# Altium PCB Mixed Signal Board Design Project.PcbDoc (part 1 of 2)
Units mm, origin at the board's own origin, x right, y up, seen from the top; angles counter-clockwise.
Board outline 70 x 70 mm, 4 copper layers (Top Layer, GND, VCC, Bottom Layer), stack 1.57 mm thick; 188 components, 142 nets, 738 pads, 121 vias.
Unrouted connection lines stored in the file: 495.
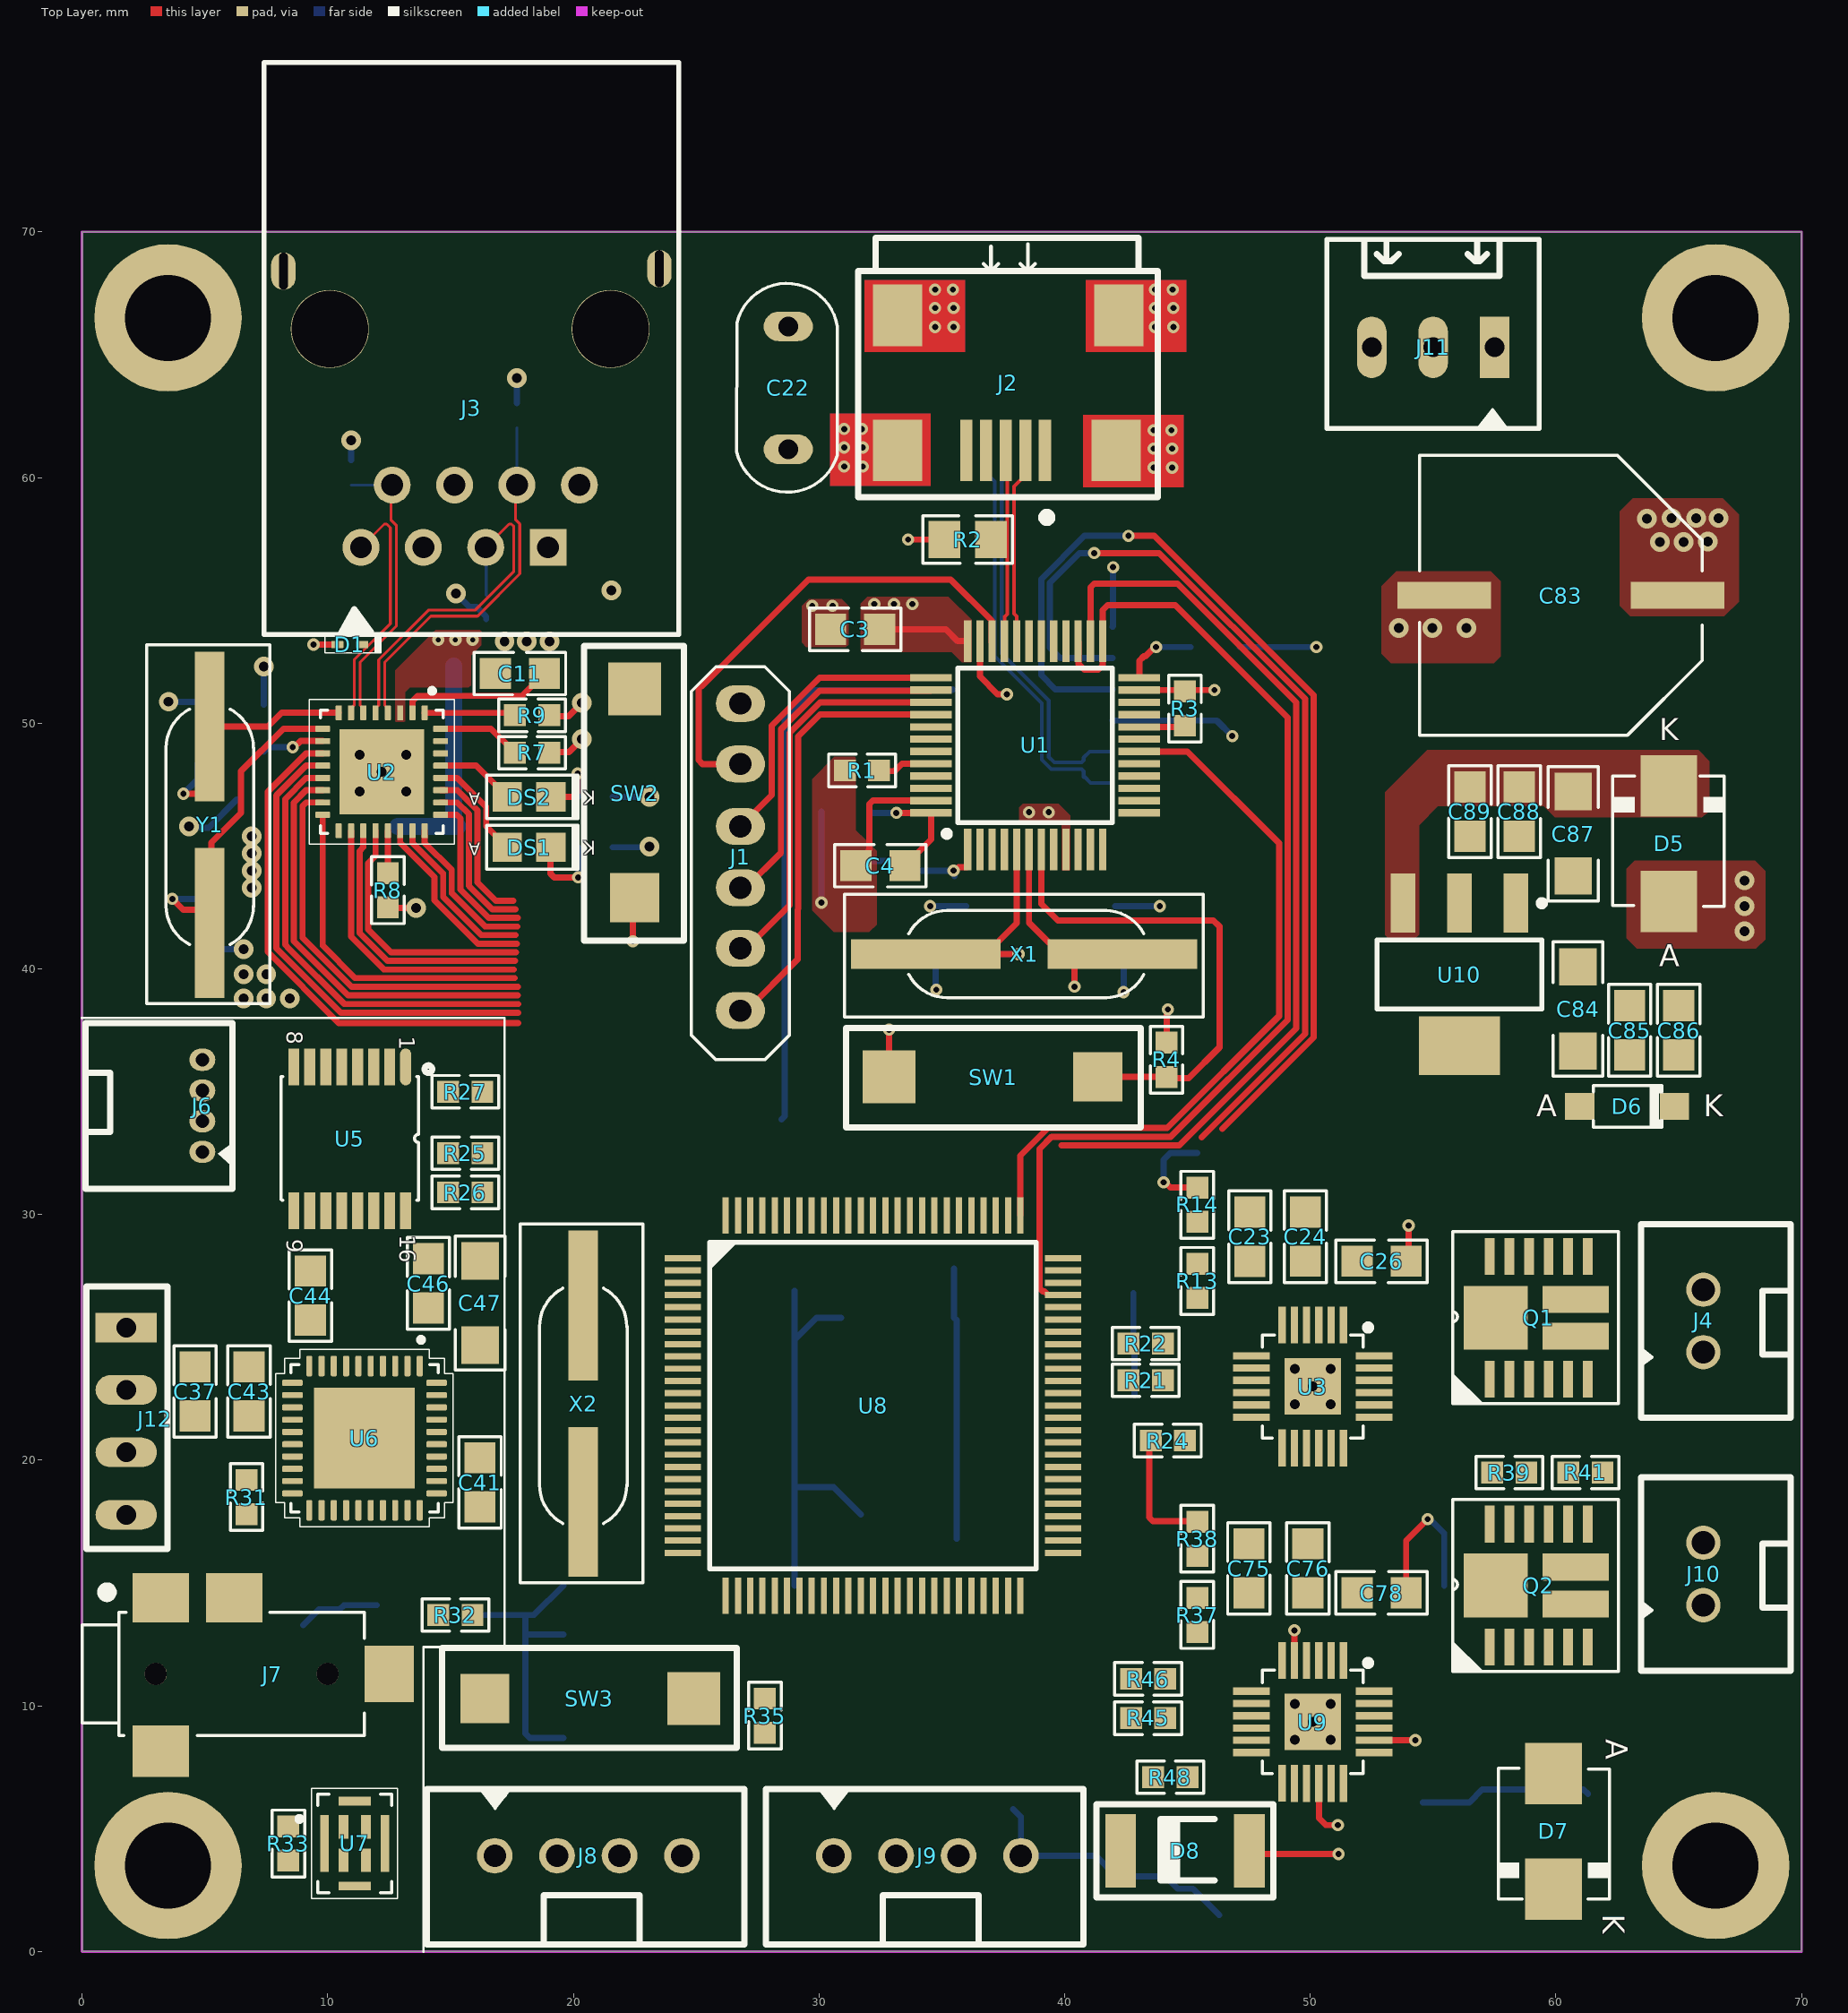
[diagram p0: Top Layer view]
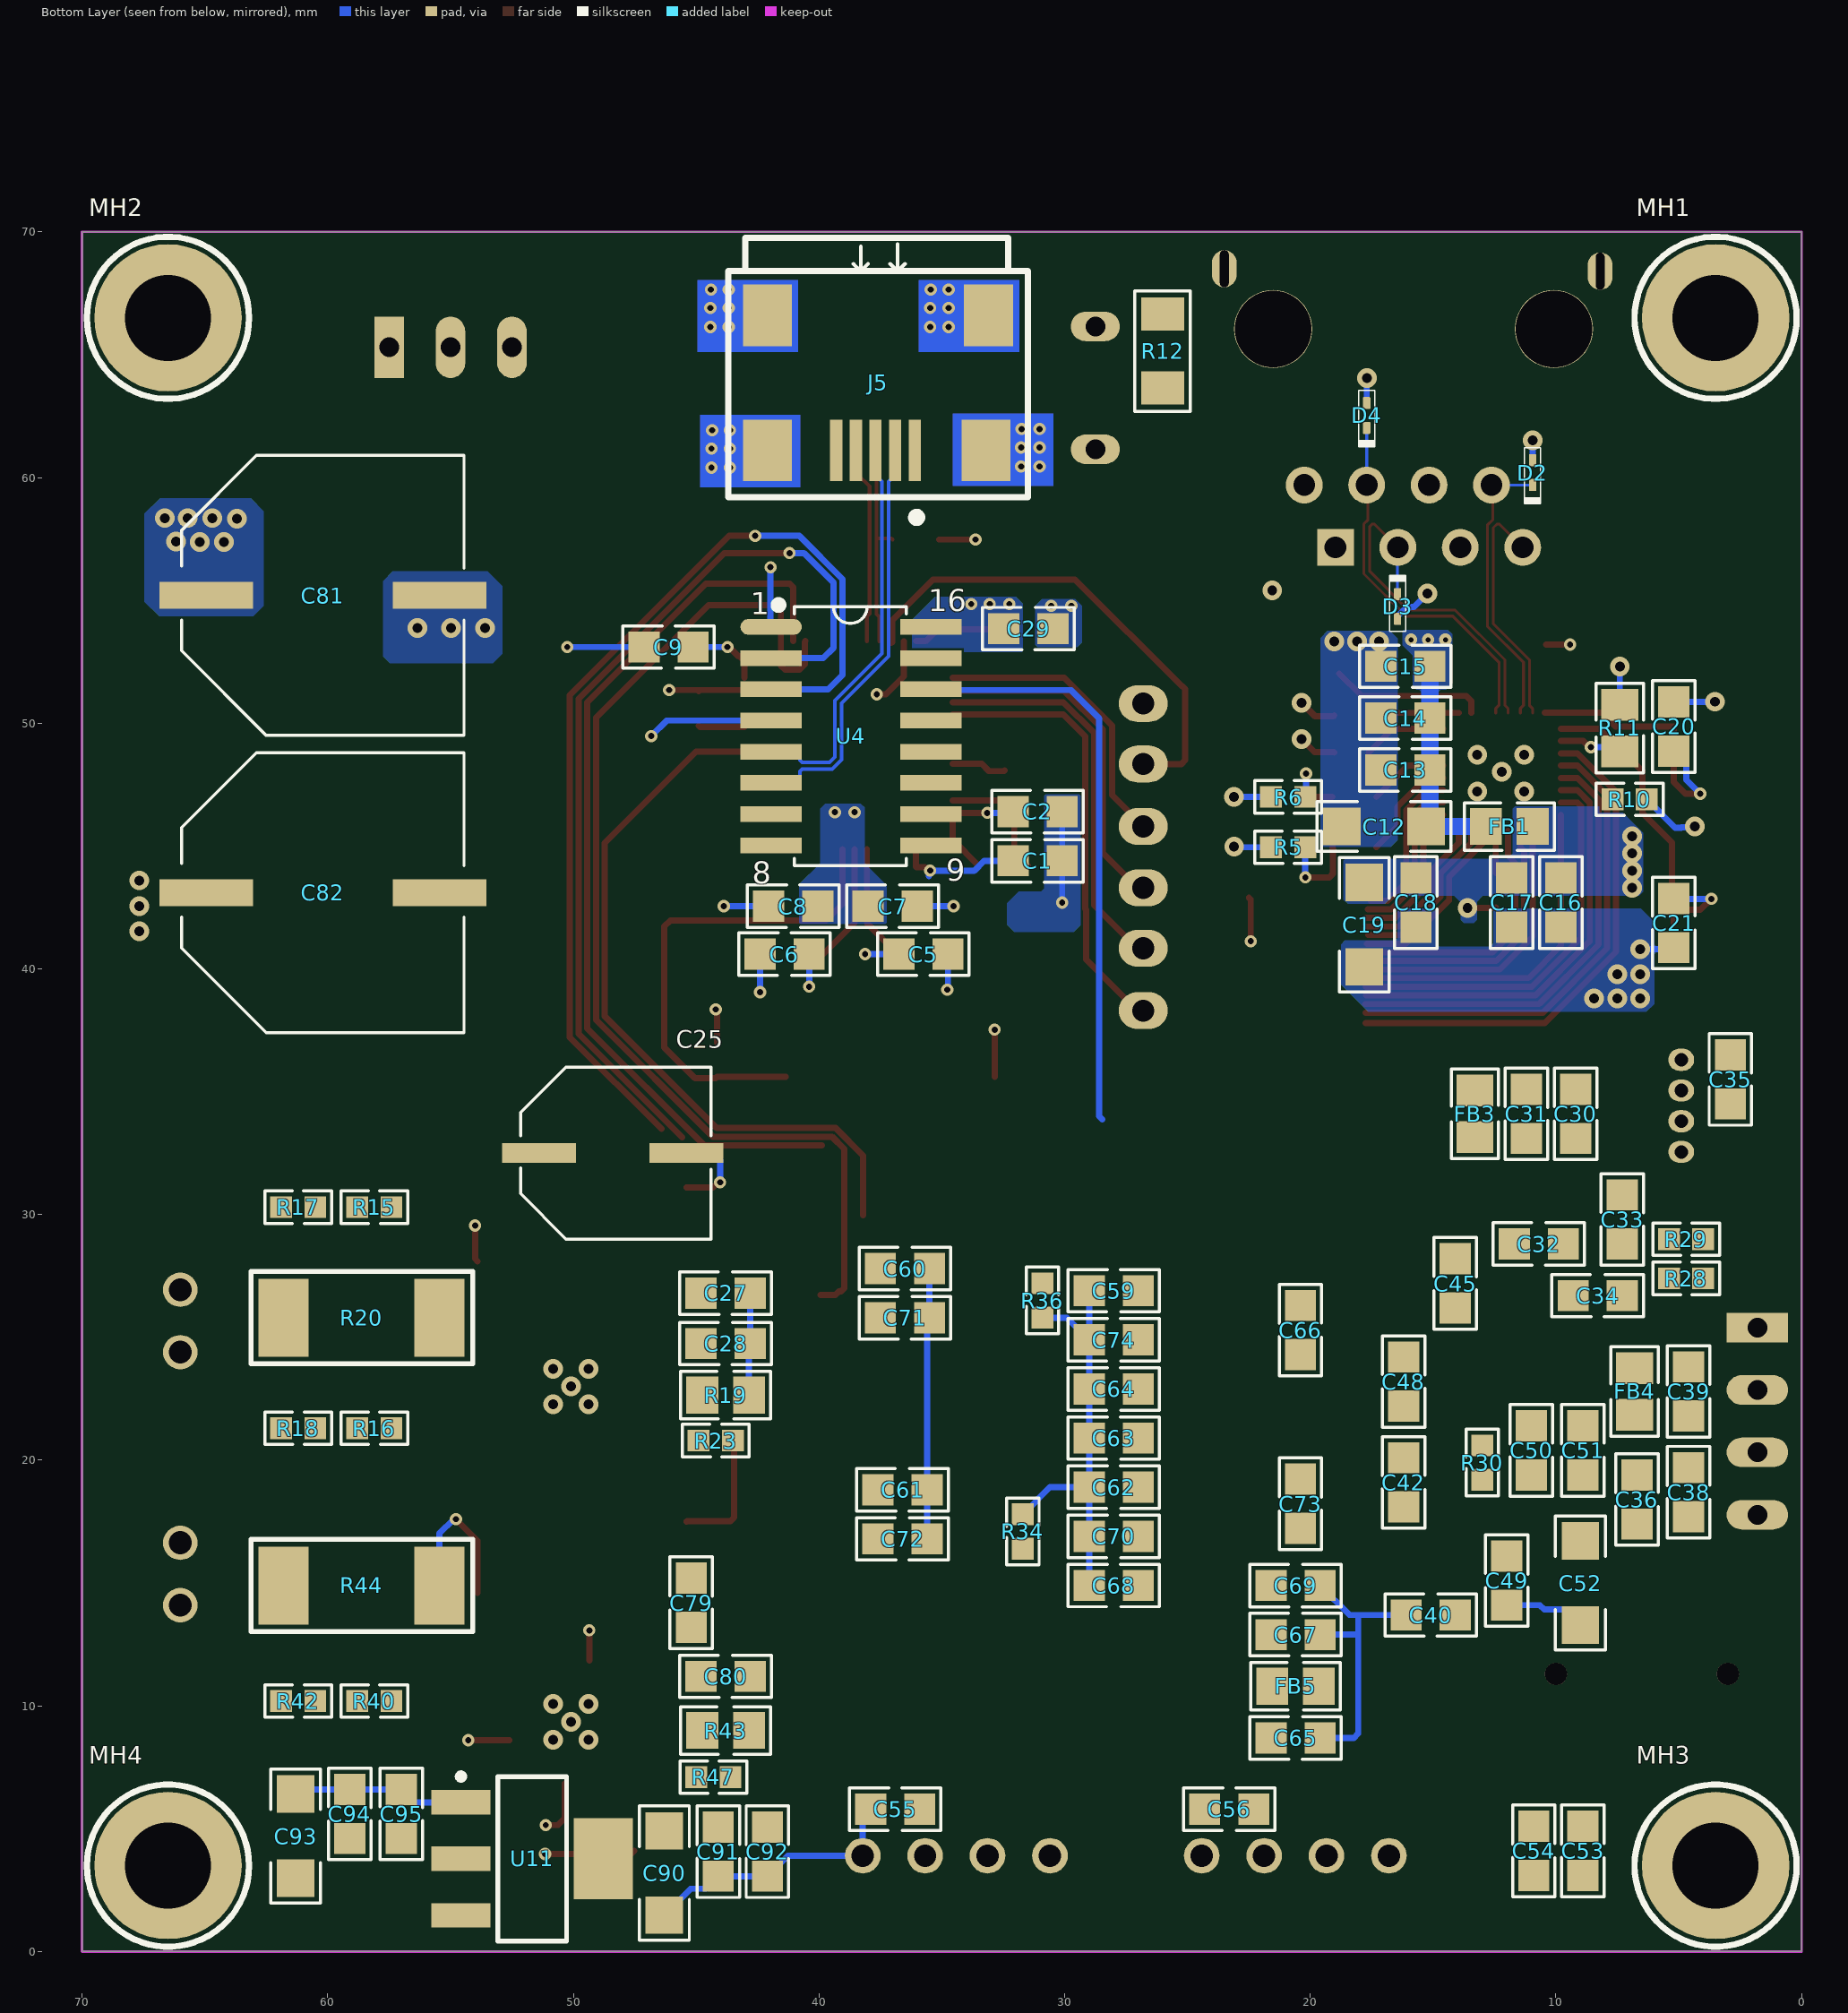
[diagram p1: Bottom Layer view, seen from below]
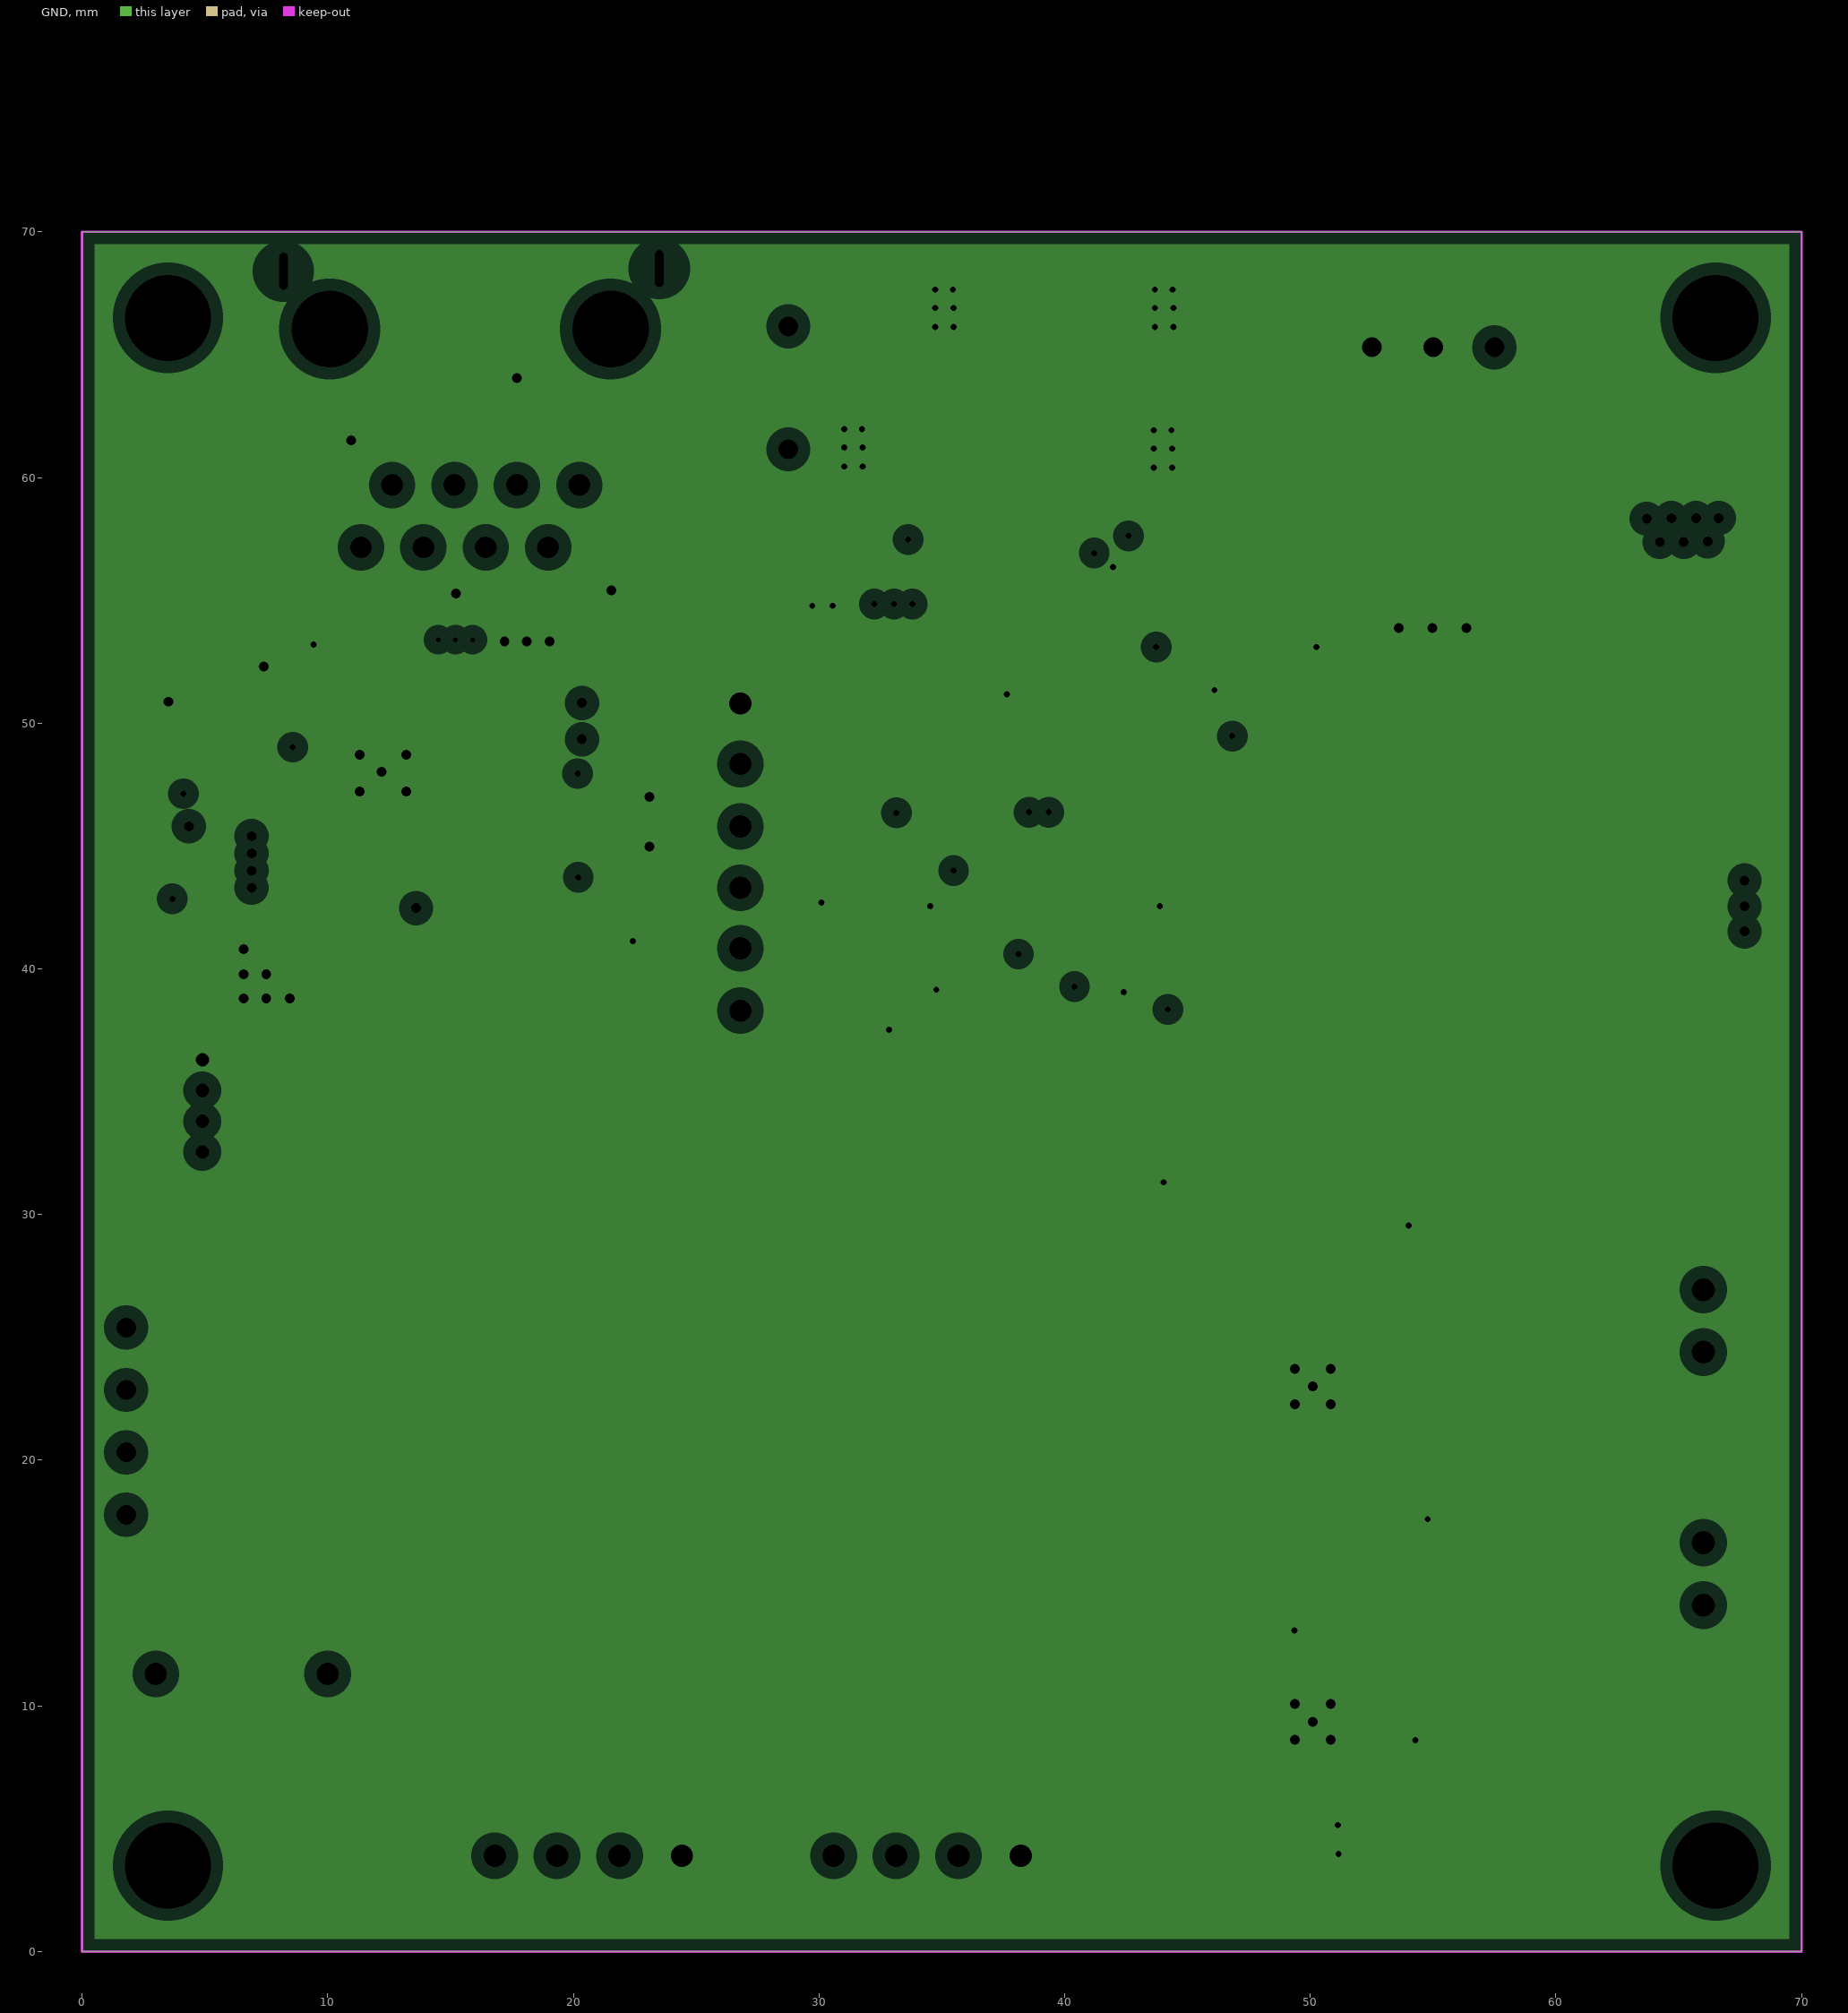
[diagram p2: GND, clearances drawn from the general rule]
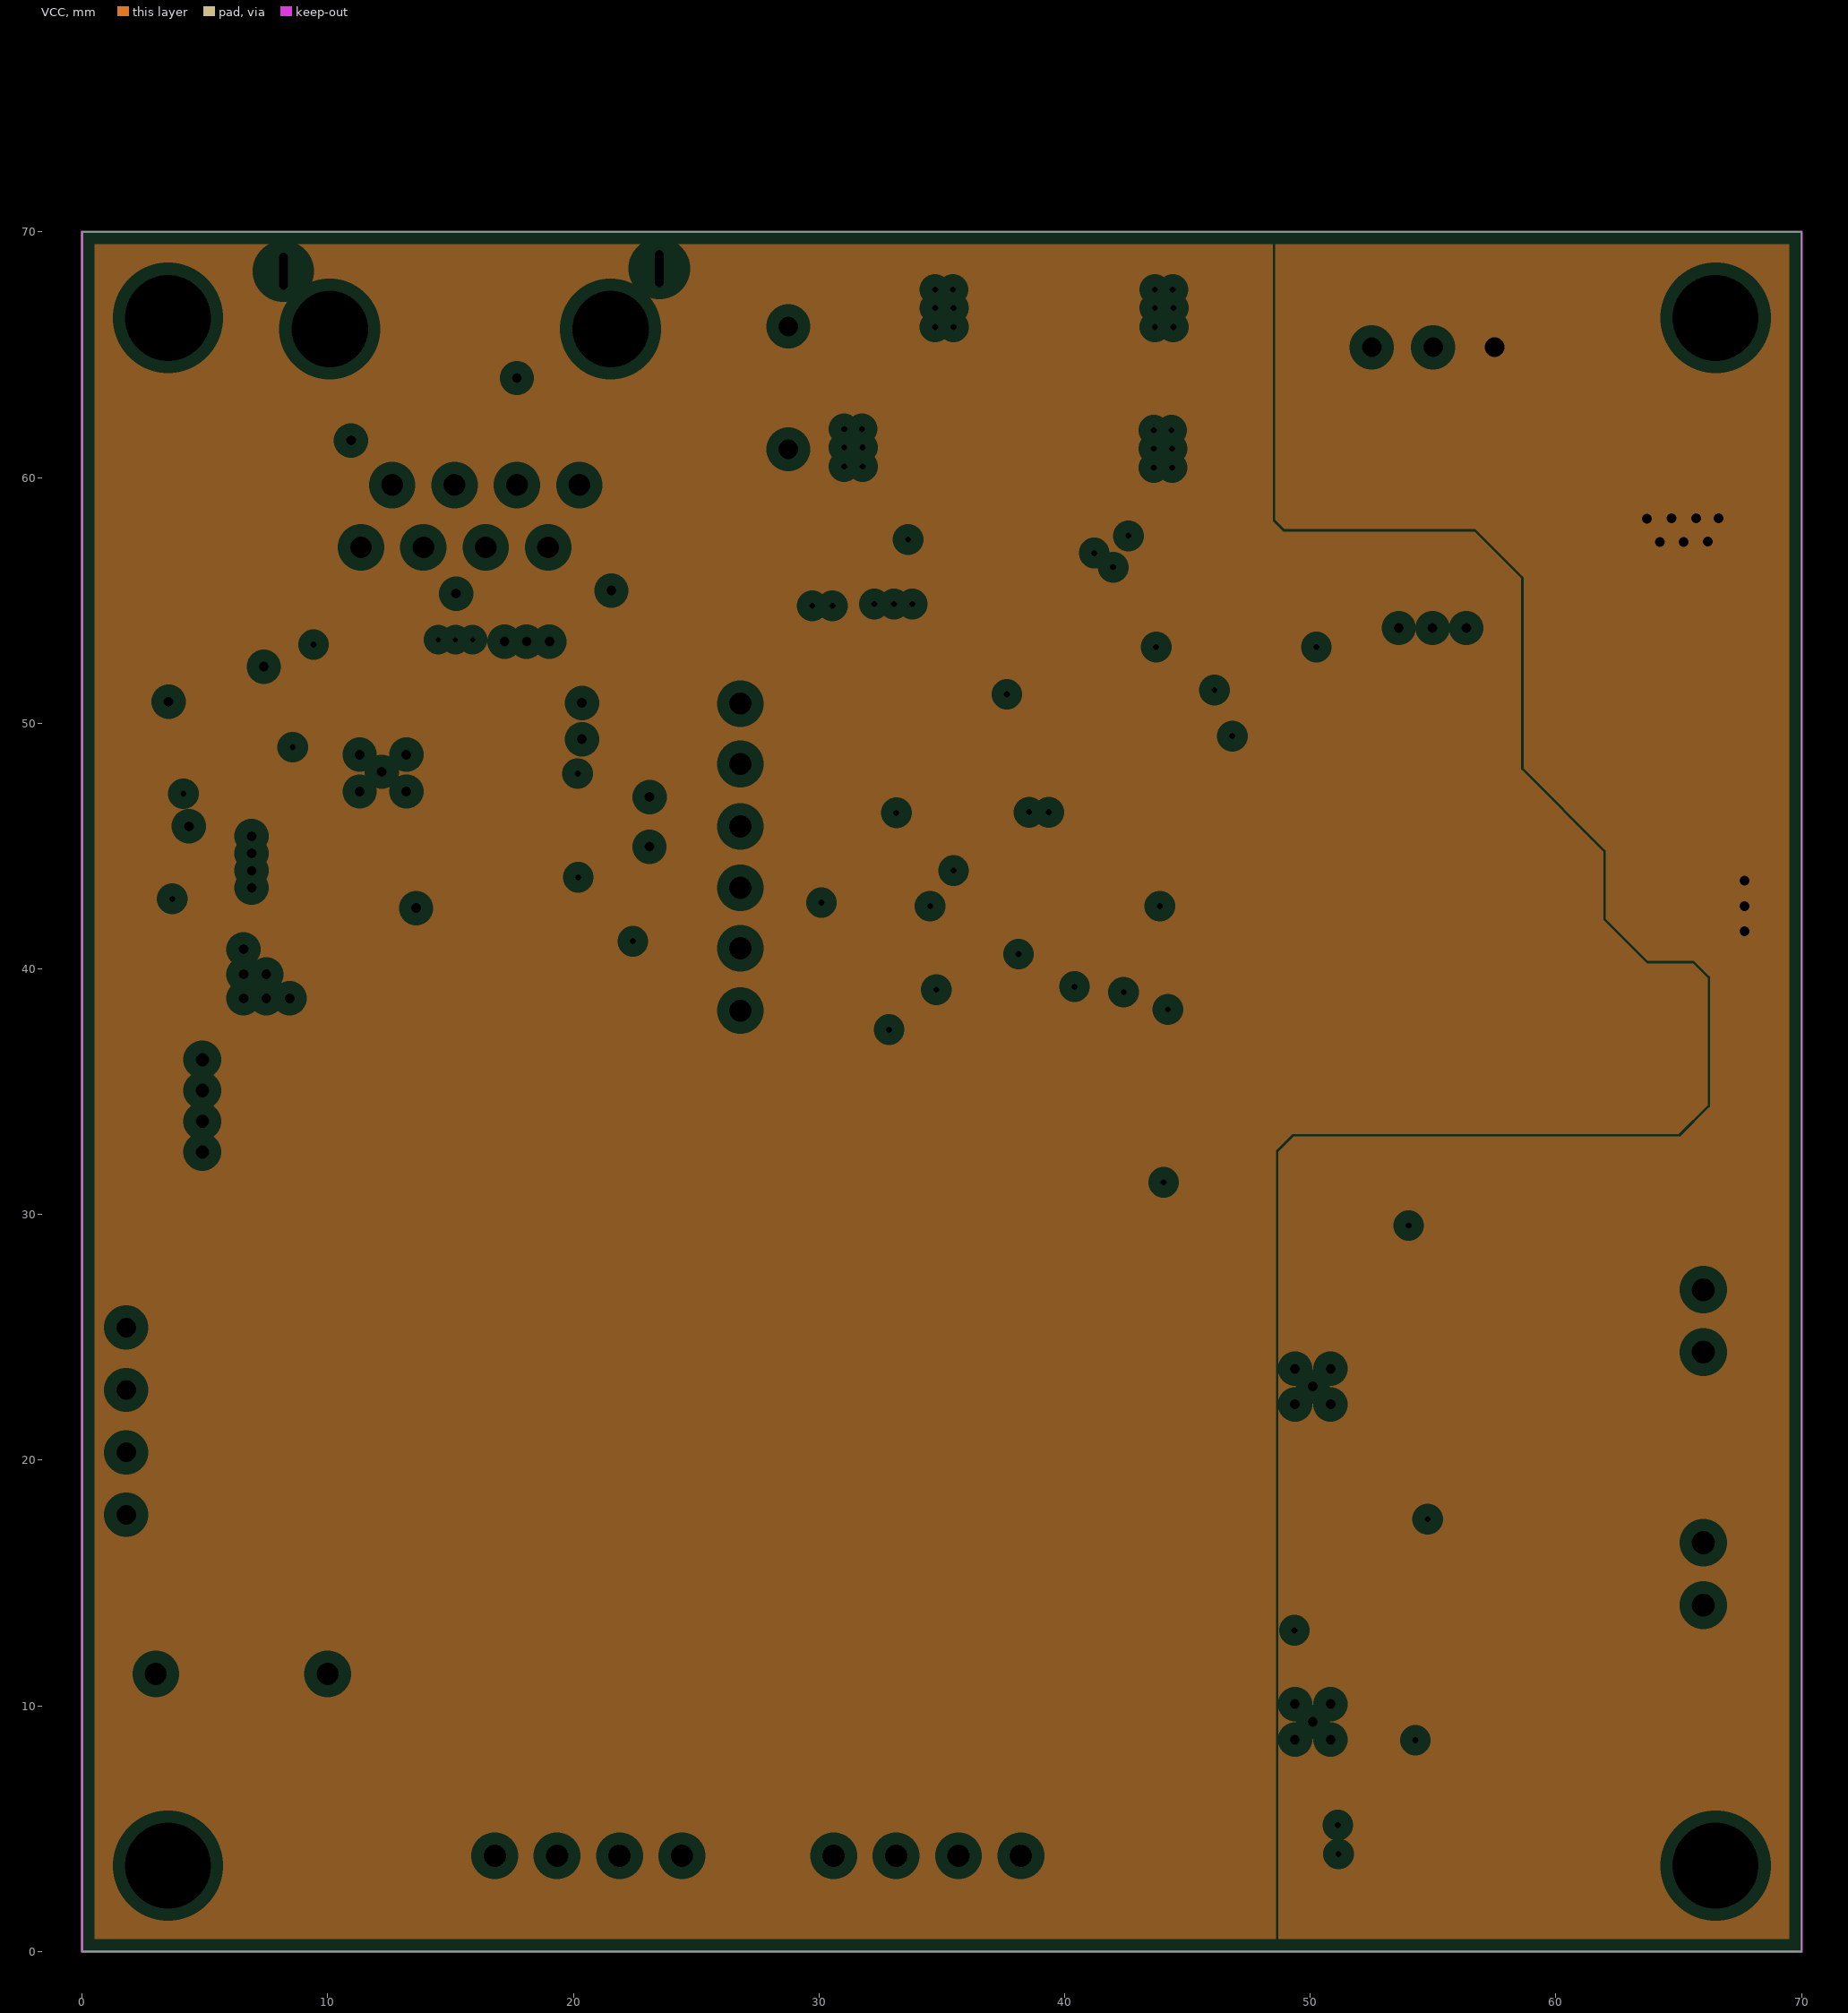
[diagram p3: VCC, clearances drawn from the general rule]

## Layer stack, top to bottom
Top Solder: solder mask 0.01, Solder Resist, Dk 3.5
Top Layer: signal copper 0.035
Dielectric 2: prepreg 0.1, PP-006, Dk 4.1
GND: plane copper 0.0175, net GND
Dielectric 1: dielectric 1.265, FR-4, Dk 4.8
VCC: plane copper 0.0175, net +3V3
Dielectric 3: prepreg 0.1, PP-006, Dk 4.1
Bottom Layer: signal copper 0.035
Bottom Solder: solder mask 0.01, Solder Resist, Dk 3.5

## Board outline
0,0 70,0 70,70 0,70

## Design rules (kind name [scope] priority, off if disabled: settings)
Clearance [All] p1: gap=0.1 ignorepadtopadclearanceinfootprint=FALSE
DiffPairsRouting "DIFF 100" [InDifferentialPairClass('DIFF100')] p1: maxlimit=0.127 minlimit=0.127 mostfreqgap=0.127 toplayer_minwidth=0.115 toplayer_maxwidth=0.115 toplayer_prefwidth=0.115 bottomlayer_minwidth=0.115 bottomlayer_maxwidth=0.115 bottomlayer_prefwidth=0.115 impedanceprofiledriven=TRUE impedanceprofileid={86F429B1-673F-4F48-8C56-42AE55F8C512} impedanceprofilevalue=100.000000 maxuncoupledlength=12.7
DiffPairsRouting [InDifferentialPairClass('DIFF90')] p2: maxlimit=0.127 minlimit=0.127 mostfreqgap=0.127 toplayer_minwidth=0.15 toplayer_maxwidth=0.15 toplayer_prefwidth=0.15 bottomlayer_minwidth=0.15 bottomlayer_maxwidth=0.15 bottomlayer_prefwidth=0.15 impedanceprofiledriven=TRUE impedanceprofileid={0B4FF4B0-A2EA-423A-8835-496D2E1C4AB5} impedanceprofilevalue=90.000000 maxuncoupledlength=12.7
MinimumSolderMaskSliver [All] p1: minsoldermaskwidth=0
PasteMaskExpansion [All] p1: expansion=-2539.975 usepaste=FALSE
PlaneClearance [All] p1: clearance=0.5
PlaneConnect [All] p1: planeconnectstyle=Direct reliefexpansion=0.508 reliefentries=4 reliefconductorwidth=0.254 reliefairgap=0.254
PolygonConnect [All] p1: connectstyle=Direct reliefconductorwidth=0.254 reliefentries=4 polygonreliefangle="90 Angle" airgapwidth=0.254
RoutingVias [All] p1: holewidth=0.3 width=0.6 viastyle="Through Hole" minholewidth=0.1 minwidth=0.1 maxholewidth=4 maxwidth=3
SilkToSilkClearance [All] p1: silktosilkclearance=0
SilkToSolderMaskClearance [IsPad] p1: minsilkscreentomaskgap=0.2 clearancetoexposedcopper=TRUE
SolderMaskExpansion [All] p1: expansion=0 istentingtop=TRUE
SupplyNets "Schematic Supply Nets_7" [InNet('GND')] p1: voltage=0.000
SupplyNets "Schematic Supply Nets_6" [InNet('+1V8')] p2: voltage=0.000
SupplyNets "Schematic Supply Nets_5" [InNet('DVDD')] p3: voltage=0.000
SupplyNets "Schematic Supply Nets_4" [InNet('ERATH')] p4: voltage=0.000
SupplyNets "Schematic Supply Nets_3" [InNet('+3V3')] p5: voltage=0.000
SupplyNets "Schematic Supply Nets_2" [InNet('+12V')] p6: voltage=0.000
Width [All] p1: maxlimit=3 minlimit=0.01 preferedwidth=0.254
23 further rules are at their usual default settings.

## Classes and differential pairs
net class DIFF50: COL CRS INT MDC MDIO RX_CLK RX_D0 RX_D1 RX_D2 RX_D3 RX_DV RX_ER TX_CLK TX_D0 TX_D1 TX_D2 TX_D3 TX_EN
differential pair class DIFF100: RD TD
differential pair class DIFF90: CH340USB USB
component class "[11] - Power Input and Regulators": C81 C82 C83 C84 C85 C86 C87 C88 C89 C90 C91 C92 C93 C94 C95 D5 D6 D7 D8 J11 MH1 MH2 MH3 MH4 U10 U11
component class "[10] - Motor Driver Schematic2": C75 C76 C78 C79 C80 J10 Q2 R37 R38 R39 R40 R41 R42 R43 R44 R45 R46 R47 R48 U9
component class "[9] - STM32F407 Controller": C55 C56 C59 C60 C61 C62 C63 C64 C65 C66 C67 C68 C69 C70 C71 C72 C73 C74 FB5 J8 J9 R34 R35 R36 SW3 U8 X2
component class "[8] - DAC and MIC": C36 C37 C38 C39 C40 C41 C42 C43 C44 C45 C46 C47 C48 C49 C50 C51 C52 C53 C54 FB4 J7 J12 R30 R31 R32 R33 U6 U7
component class "[7] - ADC Chip": C30 C31 C32 C33 C34 C35 FB3 J6 R25 R26 R27 R28 R29 U5
component class "[6] - CH340C": C29 J5 U4
component class "[5] - Motor Driver Schematic": C23 C24 C25 C26 C27 C28 J4 Q1 R13 R14 R15 R16 R17 R18 R19 R20 R21 R22 R23 R24 U3
component class "[4] - Ethernet PHY": C11 C12 C13 C14 C15 C16 C17 C18 C19 C20 C21 C22 D1 D2 D3 D4 DS1 DS2 FB1 J3 R5 R6 R7 R8 R9 R10 R11 R12 SW2 U2 Y1
component class "[3] - STM32F103 Debugger": C1 C2 C3 C4 C5 C6 C7 C8 C9 J1 J2 R1 R2 R3 R4 SW1 U1 X1
differential pair USB: +USB_P -USB_N
differential pair TD: +TD_P -TD_N
differential pair RD: +RD_P -RD_N
differential pair CH340USB: +CH340USB_P -CH340USB_N

## Components (designator, comment, footprint, x,y, rotation, side; value= is the part's Value field where it differs from the comment)
C1 "4.7uF" CAP_0805#1 31.1,44.4 r0 bottom
C2 "0.1uF" CAP_0805#1 31.1,46.4 r0 bottom
C3 "0.1uF" CAP_0805#2 31.475,53.825 r0 top
C4 "0.1uF" CAP_0805#2 32.5,44.2 r0 top
C5 "30pF" CAP_0805#1 35.75,40.6 r0 bottom
C6 "30pF" CAP_0805#1 41.4,40.6 r180 bottom
C7 "1uF" CAP_0805#1 37,42.55 r0 bottom
C8 "10nF" CAP_0805#1 41.05,42.55 r180 bottom
C9 "0.1uF" CAP_0805#1 46.125,53.1 r180 bottom
C11 "2nF" CAP_0805#2 17.825,52.022 r0 top
C12 "10uF" CAP_1206 17,45.8 r180 bottom
C13 "1uF" CAP_0805#1 16.133,48.1 r180 bottom
C14 "0.1uF" CAP_0805#1 16.133,50.208 r180 bottom
C15 "10nF" CAP_0805#1 16.133,52.317 r180 bottom
C16 "10nF" CAP_0805#1 9.8,42.7 r270 bottom
C17 "0.1uF" CAP_0805#1 11.8,42.7 r270 bottom
C18 "1uF" CAP_0805#1 15.7,42.7 r270 bottom
C19 "10uF" CAP_1206 17.8,41.8 r270 bottom
C20 "20pF" CAP_0805#1 5.2,49.866 r270 bottom
C21 "20pF" CAP_0805#1 5.2,41.866 r90 bottom
C22 "10nF" CAP_P196_102X287_H332_RAD_TH 28.75,61.15 r90 top
C23 "0.1uF" CAP_0805#2 47.54,29.097 r270 top
C24 "1uF" CAP_0805#2 49.8,29.1 r270 top
C25 "100uF" ACAP_P236_D305_H303_RAD 48.4,32.5 r180 bottom
C26 "0.1uF" CAP_0805#2 52.9,28.1 r180 top
C27 "1uF" CAP_0805#1 43.8,26.8 r0 bottom
C28 "1uF" CAP_0805#1 43.8,24.75 r0 bottom
C29 "0.1uF" CAP_0805#1 31.475,53.85 r0 bottom
C30 "0.1uF" CAP_0805#2 9.2,34.1 r270 bottom
C31 "0.1uF" CAP_0805#2 11.2,34.1 r270 bottom
C32 "0.1uF" CAP_0805#2 10.7,28.8 r0 bottom
C33 "10nF" CAP_0805#2 7.3,29.8 r270 bottom
C34 "10nF" CAP_0805#2 8.3,26.7 r0 bottom
C35 "0.1uF" CAP_0805#2 2.9,35.5 r270 bottom
C36 "22nF" CAP_0805#2 6.7,18.4 r90 bottom
C37 "0.1uF" CAP_0805#2 4.6,22.8 r90 top
C38 "0.1uF" CAP_0805#2 4.6,18.7 r90 bottom
C39 "1uF" CAP_0805#2 4.6,22.8 r90 bottom
C40 "22nF" CAP_0805#2 15.1,13.7 r0 bottom
C41 "1uF" CAP_0805#2 16.2,19.1 r90 top
C42 "0.1uF" CAP_0805#2 16.2,19.1 r90 bottom
C43 "1uF" CAP_0805#2 6.8,22.8 r90 top
C44 "1uF" CAP_0805#2 9.3,26.7 r90 top
C45 "0.1uF" CAP_0805#2 14.1,27.2 r270 bottom
C46 "1uF" CAP_0805#2 14.1,27.2 r270 top
C47 "10uF" CAP_1206 16.2,26.4 r90 top
C48 "0.1uF" CAP_0805#2 16.2,23.2 r270 bottom
C49 "150pF" CAP_0805#2 12,15.1 r270 bottom
C50 "150pF" CAP_0805#2 11,20.4 r90 bottom
C51 "1uF" CAP_0805#2 8.9,20.4 r90 bottom
C52 "10uF" CAP_1206 9,15 r270 bottom
C53 "0.1uF" CAP_0805#2 8.9,4.1 r90 bottom
C54 "1uF" CAP_0805#2 10.9,4.1 r90 bottom
C55 "0.1uF" CAP_0805#1 36.9,5.8 r180 bottom
C56 "0.1uF" CAP_0805#1 23.3,5.8 r180 bottom
C59 "4.7uF" CAP_0805#2 28,26.9 r180 bottom
C60 "0.1uF" CAP_0805#2 36.5,27.8 r0 bottom
C61 "0.1uF" CAP_0805#2 36.6,18.8 r0 bottom
C62 "0.1uF" CAP_0805#2 28,18.9 r180 bottom
C63 "0.1uF" CAP_0805#2 28,20.9 r180 bottom
C64 "0.1uF" CAP_0805#2 28,22.9 r180 bottom
C65 "0.1uF" CAP_0805#2 20.6,8.7 r0 bottom
C66 "30pF" CAP_0805#1 20.4,25.3 r90 bottom
C67 "1uF" CAP_0805#2 20.6,12.9 r0 bottom
C68 "1uF" CAP_0805#2 28,14.9 r180 bottom
C69 "0.1uF" CAP_0805#2 20.6,14.9 r0 bottom
C70 "0.1uF" CAP_0805#2 28,16.9 r180 bottom
C71 "2.2uF" CAP_0805#2 36.5,25.8 r0 bottom
C72 "2.2uF" CAP_0805#2 36.6,16.8 r0 bottom
C73 "30pF" CAP_0805#1 20.4,18.227 r270 bottom
C74 "0.1uF" CAP_0805#2 28,24.9 r180 bottom
C75 "0.1uF" CAP_0805#2 47.5,15.6 r270 top
C76 "1uF" CAP_0805#2 49.9,15.6 r270 top
C78 "0.1uF" CAP_0805#2 52.9,14.6 r180 top
C79 "1uF" CAP_0805#1 45.2,14.2 r270 bottom
C80 "1uF" CAP_0805#1 43.8,11.2 r0 bottom
C81 "100uF" ACAP_P305_D393_H393_RAD 60.2,55.2 r180 bottom
C82 "100uF" ACAP_P305_D393_H393_RAD 60.2,43.1 r180 bottom
C83 "100uF" ACAP_P305_D393_H393_RAD 60.2,55.2 r180 top
C84 "10uF" CAP_1206 60.9,38.367 r270 top
C85 "1uF" CAP_0805#2 63,37.5 r270 top
C86 "0.1uF" CAP_0805#2 65,37.5 r270 top
C87 "10uF" CAP_1206 60.7,45.5 r90 top
C88 "1uF" CAP_0805#2 58.5,46.4 r90 top
C89 "0.1uF" CAP_0805#2 56.5,46.4 r90 top
C90 "10uF" CAP_1206 46.3,3.2 r90 bottom
C91 "1uF" CAP_0805#2 44.1,4.067 r90 bottom
C92 "0.1uF" CAP_0805#2 42.1,4.067 r90 bottom
C93 "10uF" CAP_1206 61.3,4.7 r270 bottom
C94 "1uF" CAP_0805#2 59.1,5.6 r270 bottom
C95 "0.1uF" CAP_0805#2 57,5.6 r270 bottom
D1 "ESD3V3D9-TP" DIO_SOD-923 10.9,53.2 r180 top
D2 "ESD3V3D9-TP" DIO_SOD-923 10.95,60.2 r90 bottom
D3 "ESD3V3D9-TP" DIO_SOD-923 16.45,54.75 r270 bottom
D4 "ESD3V3D9-TP" DIO_SOD-923 17.705,62.525 r90 bottom
D5 "MBRS130LT3G" DIO_SMB_DO-214AA 64.6,45.1 r90 top
D6 "BZT52C3V3-7-F" DIO_SOD-123 62.9,34.4 r0 top
D7 "MBRS130LT3G" DIO_SMB_DO-214AA 59.9,4.9 r270 top
D8 "1.8V Zener" DIO_DO-213AB_SMD 44.9,4.1 r0 top
DS1 "RED LED" LED_0805 18.2,44.95 r180 top
DS2 "RED LED" LED_0805 18.2,47 r180 top
FB1 "1K" IND_0805#1 11.9,45.795 r180 bottom
FB3 "1K" IND_0805#2 13.3,34.1 r270 bottom
FB4 "1K" IND_0805#2 6.8,22.8 r270 bottom
FB5 "1K" IND_0805#2 20.6,10.8 r180 bottom
J1 "Bergstrip 2.54mm" CON6_100_59D78_TH_ST 26.8,38.3 r90 top
J2 "USB2.0 MINI B" CON_690-005-299-043 33.2,61.1 r270 top
J3 "RJ45 LAN" CON10_P106_RJ45_TH_ST 21.5,66.1 r180 top
J4 "B2B-XH-A(LF)(SN)" CON2_100_B2B-XH-A_TH_ST 66,24.4 r90 top
J5 "USB2.0 MINI B" CON_690-005-299-043 42.1,61.1 r270 bottom
J6 "1.25MM Spade 4PIN" CON4_50_653004117322_TH_RA 4.9,36.3 r90 top
J7 "4X1 STEREO" CON_SJ-2504A-SMT-TR_SMD 6.5,11.3 r0 top
J8 "B4B-XH-A(LF)(SN)" CON4_100_B4B-XH-A_TH_ST 16.8,3.9 r0 top
J9 "B4B-XH-A(LF)(SN)" CON4_100_B4B-XH-A_TH_ST 30.6,3.9 r0 top
J10 "B2B-XH-A(LF)(SN)" CON2_100_B2B-XH-A_TH_ST 66,14.1 r90 top
J11 "Terminal Block 2.5mm" CON3_100_TB_TH_ST 55,65.3 r270 top
J12 "4X1 BERG STRIP" CON4_100_40D72_TH_ST_MALE 1.8,25.4 r0 top
MH1 "Mounting Hole" MOUNTING 3.5,66.5 r180 bottom
MH2 "Mounting Hole" MOUNTING 66.5,66.5 r180 bottom
MH3 "Mounting Hole" MOUNTING 3.5,3.5 r180 bottom
MH4 "Mounting Hole" MOUNTING 66.5,3.5 r180 bottom
Q1 "DMHT6016LFJ-13" DFN5045-12_33_212_27X15_SMD_1 59.3,25.8 r0 top
Q2 "DMHT6016LFJ-13" DFN5045-12_33_212_27X15_SMD_1 59.3,14.9 r0 top
R1 "100K" RES_0603#1 31.75,48.075 r180 top
R2 "1.5K" RES_0805#1 36.05,57.475 r0 top
R3 "100K" RES_0603#2 44.9,50.6 r270 top
R4 "10K" RES_0603#1 44.15,36.3 r90 top
R5 "3K3" RES_0603#2 20.902,44.95 r180 bottom
R6 "3K3" RES_0603#2 20.902,47 r180 bottom
R7 "3K3" RES_0603#1 18.32,48.8 r180 top
R8 "10K" RES_0603#1 12.45,43.2 r270 top
R9 "10K" RES_0603#1 18.32,50.322 r0 top
R10 "10K" RES_0603#2 7,46.9 r180 bottom
R11 "6.49K" RES_0805#2 7.4,49.8 r90 bottom
R12 "1M" RES_1206 26,65.15 r270 bottom
R13 "2K2" RES_0603#1 45.4,27.3 r90 top
R14 "3K3" RES_0603#1 45.4,30.4 r270 top
R15 "10K" RES_0603#2 58.1,30.3 r0 bottom
R16 "10K" RES_0603#2 58.1,21.3 r0 bottom
R17 "10K" RES_0603#2 61.2,30.3 r0 bottom
R18 "10K" RES_0603#2 61.2,21.3 r180 bottom
R19 "33K" RES_0805#2 43.8,22.65 r180 bottom
R20 "50mOHM" RES_2512 58.625,25.8 r0 bottom
R21 "10K" RES_0603#1 43.3,23.25 r180 top
R22 "10K" RES_0603#1 43.3,24.75 r180 top
R23 "10K" RES_0603#2 44.202,20.8 r180 bottom
R24 "10K" RES_0603#1 44.202,20.8 r180 top
R25 "10K" RES_0603#1 15.6,32.5 r0 top
R26 "10K" RES_0603#1 15.6,30.9 r0 top
R27 "100K" RES_0603#1 15.6,35 r180 top
R28 "1K" RES_0603#1 4.702,27.4 r180 bottom
R29 "1K" RES_0603#1 4.702,29 r180 bottom
R30 "10K" RES_0603#1 13,19.9 r90 bottom
R31 "51.1R" RES_0603#1 6.7,18.5 r270 top
R32 "51.1R" RES_0603#1 15.2,13.7 r180 top
R33 "10K" RES_0603#1 8.4,4.4 r90 top
R34 "100K" RES_0603#1 31.7,17.1 r270 bottom
R35 "10K" RES_0603#1 27.8,9.6 r270 top
R36 "100K" RES_0603#2 30.9,26.5 r90 bottom
R37 "2K2" RES_0603#1 45.4,13.7 r90 top
R38 "3K3" RES_0603#1 45.4,16.8 r270 top
R39 "10K" RES_0603#1 58.1,19.5 r0 top
R40 "10K" RES_0603#2 58.1,10.2 r0 bottom
R41 "10K" RES_0603#1 61.2,19.5 r0 top
R42 "10K" RES_0603#2 61.2,10.2 r180 bottom
R43 "33K" RES_0805#2 43.8,9 r180 bottom
R44 "50mOHM" RES_2512 58.625,14.9 r0 bottom
R45 "10K" RES_0603#1 43.4,9.5 r180 top
R46 "10K" RES_0603#1 43.4,11.1 r0 top
R47 "10K" RES_0603#2 44.3,7.1 r180 bottom
R48 "10K" RES_0603#1 44.3,7.1 r180 top
SW1 "TACTILE SWITCH" SW_342_SMD 41.35,35.6 r0 top
SW2 "TACTILE SWITCH" SW_342_SMD 22.5,42.9 r270 top
SW3 "TACTILE SWITCH" SW_342_SMD 16.4,10.3 r180 top
U1 "STM32F103C8T6" LQFP-48_19.6_393_58X11_SMD 38.8,49.1 r90 top
U2 "DP83826IRHBR" VQFN32_19_218_23X9_SMD 12.2,48.022 r270 top
U3 "DRV8701ERGET" VFQFN24_19.6_196_12X32_SMD_1 48.1,24.25 r270 top
U4 "CH340C" SOIC16_50_284_25X90_SMT 38.7,49.5 r180 bottom
U5 "ADS122C04IPW" TSSOP16_25-59_294_54X14_SMT 10.9,33.1 r270 top
U6 "CS43L22-CNZ" QFN40_19_284_33X9_SMD 11.5,20.9 r270 top
U7 "IMP34DT05TR" HCLGA-4_53_137_15X37_SMD 11.1,4.4 r0 top
U8 "STM32F407VGT6" QFN100_19.6_669_58X10_SMD 32.2,22.1 r0 top
U9 "DRV8701ERGET" VFQFN24_19.6_196_12X32_SMD_1 48.1,10.6 r270 top
U10 "LD1117S33CTR" SOT223_3 56.1,39.8 r270 top
U11 "LD1117S33CTR" SOT223_3 51.7,3.8 r180 bottom
X1 "8Mhz" XTAL_314_240X47_SMD 42.35,40.6 r180 top
X2 "8Mhz" XTAL_314_240X47_SMD 20.4,18.3 r90 top
Y1 "25Mhz -14mm" XTAL_314_240X47_SMD 5.2,41.866 r90 top

## Footprints (in the part's own frame and the unit in brackets; to place one, negate y for a bottom-side part, rotate by r counter-clockwise, add the part's x,y. Pads: shape width x height; smd on the part's side, far side on the other; paste and mask are expansions set on the pad)
ACAP_P236_D305_H303_RAD [mm] "Aluminium Capacitor"
  rect 3x0.8 smd mask+0.076: 1(-3,0) 2(3,0)
  silkscreen extent -3.75,-3.5 4,3.5, body extent -3.5,-3.3 3.5,3.3, height 8.11
ACAP_P305_D393_H393_RAD [mm] "Aluminium Capacitor"
  rect 3.81x1.1 smd: 1(-4.75,0) 2(4.75,0)
  silkscreen extent -5.75,-5.7 5.75,5.7, body extent -5.5,-5.2 5.5,5.2, height 10.41
CAP_0805#1 [mm] "Ceramic Capacitor"
  rect 1.27x1.27 smd mask+0.076: 1(-1,0) 2(1,0)
  silkscreen extent -1.86,-0.86 1.86,0.86, body extent -1,-0.62 1,0.63, height 0.78
CAP_0805#2 [mm] "Ceramic Capacitor"
  rect 1.27x1.27 smd: 1(-1,0) 2(1,0)
  silkscreen extent -1.86,-0.86 1.86,0.86, body extent -1,-0.62 1,0.63, height 0.78
CAP_1206 [mil] "Ceramic Capacitor"
  rect 60x60 smd: 1(-67.49,-0.2) 2(67.51,-0.2)
  silkscreen extent -107,-40 108,40, body extent -63,-31 63,32, height 39
CAP_P196_102X287_H332_RAD_TH [mm] "Y1 CAP, TROUGH HOLE"
  oval 1.2x2 hole 0.8: 1(0,0) 2(5,0)
  silkscreen extent -1.75,-2 6.75,2.1, body extent -1.04,-1.3 6.04,1.3, height 9.14
CON2_100_B2B-XH-A_TH_ST [mm] "Connector Header"
  round 1.4 hole 0.94: 1(0,0) 2(2.54,0)
  silkscreen extent -2.67,-3.56 5.21,2.54, body extent -2.41,-3.5 5.01,2.54, height 8.44
CON3_100_TB_TH_ST [mm]
  rect 2.5x1.2 hole 0.8: 1(0,2.5)
  oval 2.5x1.2 hole 0.8: 2(0,0) 3(0,-2.5)
  silkscreen extent -4.4,-4.32 3.3,4.32, body extent -2.5,-4.07 3.1,4.07, height 12.86
CON4_50_653004117322_TH_RA [mm] "wurth connector"
  oval 0.9x1.05 hole 0.55: 1(-3.75,0) 2(-2.5,0) 3(-1.25,0) 4(0,0)
  silkscreen extent -5.25,-1.34 1.5,4.75, body extent -5.27,-0.45 1.48,4.98, height 3.65
CON4_100_40D72_TH_ST_MALE [mm] "Berg Strip"
  rect 2.5x1.2 hole 0.8: 1(0,0)
  oval 2.5x1.2 hole 0.8: 2(0,-2.54) 3(0,-5.08) 4(0,-7.62)
  round 1.016 on Top Overlay: ""(2.311,0.178)
  silkscreen extent -1.63,-9.02 1.68,1.68, body extent -1.14,-8.76 1.4,1.4, height 8.55
CON4_100_B4B-XH-A_TH_ST [mm] "Connector Header"
  round 1.45 hole 0.91: 1(0,0) 2(2.54,0) 3(5.08,0) 4(7.62,0)
  silkscreen extent -2.77,-3.61 10.16,2.72, body extent -2.4,-3.28 10,2.48, height 8.32
CON6_100_59D78_TH_ST [mm] "Bergstrip"
  oval 1.5x2 hole 0.9: 1(0,0) 2(2.54,0) 3(5,0) 4(7.5,0) 5(10.04,0) 6(12.5,0)
  silkscreen extent -2,-2 14,2, body extent -1.35,-1.24 13.89,1.3, height 8.55
CON10_P106_RJ45_TH_ST [mm] "LAN Connector"
  round 1.5 hole 0.89 paste-2539.97: 1(10.145,8.945) 2(8.875,6.405) 3(7.605,8.945) 4(6.335,6.405) 6(3.795,6.405)
  round 1.5 hole 0.89 paste-2539.97 mask+0: 5(5.065,8.945) 8(1.255,6.405)
  rect 1.5x1.5 hole 0.89 paste-2539.97: 7(2.525,8.945)
  oval 1x1.524 hole 1.5 slot 0.35 at 0 deg: 9(13.3,-2.3) 10(-2,-2.4)
  round 3.18 hole 3.12 unplated paste-2539.97: ""(-0.015,0.055) ""(11.415,0.055)
  silkscreen extent -2.79,-10.8 14.1,12.5, body extent -2.53,-3.5 13.73,12.25, height 13.04
CON_690-005-299-043 [mm] "USB MINI-B"
  rect 2.5x0.5 smd: 1(0,6) 2(0,5.2) 3(0,4.4) 4(0,3.6) 5(0,2.8)
  rect 2.5x2 smd: 6(-5.5,9) 6(-5.5,0) 6(0,8.9) 6(0,0)
  silkscreen extent -8.66,-1.6 2.88,10.6, body extent -8.4,-0.55 0.6,9.35, height 3.96
CON_SJ-2504A-SMT-TR_SMD [mm]
  rect 2.3x2 smd: 1(-3.3,3.1) 3(-0.3,3.1)
  rect 2x2.3 smd: 2(6,0)
  rect 2.3x2.1 smd: 4(-3.3,-3.15)
  round 0.9 hole 0.9 unplated: ""(-3.5,0) ""(3.5,0)
  silkscreen extent -6.5,-2.5 5,3.53, body extent -6.5,-4 6.5,4, height 4.01
DFN5045-12_33_212_27X15_SMD_1 [mm] "CASE: DFN5045"
  rect 0.4x1.5 smd: 1(-2,-2.5) 2(-1.2,-2.5) 3(-0.4,-2.5) 4(0.4,-2.5) 5(1.2,-2.5) 6(2,-2.5) 7(2,2.5) 8(1.2,2.5) 9(0.4,2.5) 10(-0.4,2.5) 11(-1.2,2.5) 12(-2,2.5)
  rect 2.7x1.1 smd: 13(1.5,-0.75) 14(1.5,0.75)
  rect 2.6x2.6 smd: 15(-1.75,0)
  silkscreen extent -3.5,-3.5 3.25,3.5, body extent -2.5,-2.36 2.5,2.36, height 0.9
DIO_DO-213AB_SMD [mm] "Diode"
  rect 1.25x3 smd: A(2.625,0) K(-2.625,0)
  silkscreen extent -3.61,-1.9 3.6,1.9, body extent -2.49,-1.25 2.51,1.25, height 2.75
DIO_SMB_DO-214AA [mm] "Diode"
  rect 2.5x2.3 smd: A(-2.35,0) K(2.354,0)
  silkscreen extent -2.56,-2.25 2.75,2.29, body extent -2.56,-1.84 2.84,1.76, height 2.27
DIO_SOD-123 [mm] "DIODE GEN PURP"
  rect 1.2x1.1 smd: A(-1.937,0.006) K(1.923,0.006)
  silkscreen extent -1.38,-0.84 1.44,0.86, body extent -1.92,-0.84 1.92,0.86, height 1.43
DIO_SOD-923 [mm]
  rrect25% 0.49x0.3 smd: A(0.505,0) K(-0.505,0)
  silkscreen extent -1.27,-0.33 1.02,0.33
HCLGA-4_53_137_15X37_SMD [mm]
  rect 0.4x0.95 smd: 1(-0.45,0.675) 2(-0.45,-0.675) 3(0.45,-0.675) 4(0.45,0.675)
  rect 0.35x2.3 smd: 5(-1.225,0) 5(1.225,0)
  rect 1.3x0.35 smd: 5(0,-1.725) 5(0,1.725)
  silkscreen extent -2.35,-2.25 1.75,2.25, body extent -1.5,-2 1.5,2, height 1.02
IND_0805#1 [mm] "Ferrite Bead"
  rect 1.3x1.5 smd mask+0.076: 1(0.95,0) 2(-0.95,0)
  silkscreen extent -1.83,-0.97 1.83,0.97, body extent -1,-0.63 1,0.62, height 0.5
IND_0805#2 [mm] "Ferrite Bead"
  rect 1.3x1.5 smd: 1(0.95,0) 2(-0.95,0)
  silkscreen extent -1.83,-0.97 1.83,0.97, body extent -1,-0.63 1,0.62, height 0.5
LED_0805 [mm] "LED"
  rect 1.2x1.2 smd: A(0.889,0) K(-0.889,0)
  silkscreen extent -1.99,-0.89 1.73,0.89, body extent -1.01,-0.62 1.01,0.63, height 1.1
LQFP-48_19.6_393_58X11_SMD [mm] "48LQFP"
  rect 1.7x0.3 smd: 1(-4.238,2.75) 2(-4.238,2.25) 3(-4.238,1.75) 4(-4.238,1.25) 5(-4.238,0.75) 6(-4.238,0.25) 7(-4.238,-0.25) 8(-4.238,-0.75) 9(-4.238,-1.25) 10(-4.238,-1.75) 11(-4.238,-2.25) 12(-4.238,-2.75) 25(4.238,-2.75) 26(4.238,-2.25) 27(4.238,-1.75) 28(4.238,-1.25) 29(4.238,-0.75) 30(4.238,-0.25) 31(4.238,0.25) 32(4.238,0.75) 33(4.238,1.25) 34(4.238,1.75) 35(4.238,2.25) 36(4.238,2.75)
  rect 0.3x1.7 smd: 13(-2.75,-4.238) 14(-2.25,-4.238) 15(-1.75,-4.238) 16(-1.25,-4.238) 17(-0.75,-4.238) 18(-0.25,-4.238) 19(0.25,-4.238) 20(0.75,-4.238) 21(1.25,-4.238) 22(1.75,-4.238) 23(2.25,-4.238) 24(2.75,-4.238) 37(2.75,4.238) 38(2.25,4.238) 39(1.75,4.238) 40(1.25,4.238) 41(0.75,4.238) 42(0.25,4.238) 43(-0.25,4.238) 44(-0.75,4.238) 45(-1.25,4.238) 46(-1.75,4.238) 47(-2.25,4.238) 48(-2.75,4.238)
  silkscreen extent -3.72,-3.15 3.15,3.72, body extent -4.5,-4.5 4.5,4.5, height 1.7
MOUNTING [mm] "MH"
  round 6 hole 3.5: 1(0,0)
  silkscreen extent -3.3,-3.3 3.3,3.3, body extent -3,-2.75 3,2.75, height 4.24
QFN40_19_284_33X9_SMD [mm]
  rrect48% 0.84x0.25 smd: 1(-2.935,2.25) 2(-2.935,1.75) 3(-2.935,1.25) 4(-2.935,0.75) 5(-2.935,0.25) 6(-2.935,-0.25) 7(-2.935,-0.75) 8(-2.935,-1.25) 9(-2.935,-1.75) 10(-2.935,-2.25) 21(2.935,-2.25) 22(2.935,-1.75) 23(2.935,-1.25) 24(2.935,-0.75) 25(2.935,-0.25) 26(2.935,0.25) 27(2.935,0.75) 28(2.935,1.25) 29(2.935,1.75) 30(2.935,2.25)
  rrect48% 0.25x0.84 smd: 11(-2.25,-2.935) 12(-1.75,-2.935) 13(-1.25,-2.935) 14(-0.75,-2.935) 15(-0.25,-2.935) 16(0.25,-2.935) 17(0.75,-2.935) 18(1.25,-2.935) 19(1.75,-2.935) 20(2.25,-2.935) 31(2.25,2.935) 32(1.75,2.935) 33(1.25,2.935) 34(0.75,2.935) 35(0.25,2.935) 36(-0.25,2.935) 37(-0.75,2.935) 38(-1.25,2.935) 39(-1.75,2.935) 40(-2.25,2.935)
  rect 4.1x4.1 smd paste-3: 41(0,0)
  silkscreen extent -4.1,-3.61 3.61,3.61, body extent -3.07,-3 3.07,3.15, height 1.06
QFN100_19.6_669_58X10_SMD [mm] "CASE: QFN"
  rect 1.475x0.254 smd: 1(-7.738,6.127) 2(-7.738,5.627) 3(-7.738,5.127) 4(-7.738,4.627) 5(-7.738,4.127) 6(-7.738,3.627) 7(-7.738,3.127) 8(-7.738,2.627) 9(-7.738,2.127) 10(-7.738,1.627) 11(-7.738,1.127) 12(-7.738,0.627) 13(-7.738,0.127) 14(-7.738,-0.373) 15(-7.738,-0.873) 16(-7.738,-1.373) 17(-7.738,-1.873) 18(-7.738,-2.373) 19(-7.738,-2.873) 20(-7.738,-3.373) 21(-7.738,-3.873) 22(-7.738,-4.373) 23(-7.738,-4.873) 24(-7.738,-5.373) 25(-7.738,-5.873) 51(7.738,-5.873) 52(7.738,-5.373) 53(7.738,-4.873) 54(7.738,-4.373) 55(7.738,-3.873) 56(7.738,-3.373) 57(7.738,-2.873) 58(7.738,-2.373) 59(7.738,-1.873) 60(7.738,-1.373) 61(7.738,-0.873) 62(7.738,-0.373) 63(7.738,0.127) 64(7.738,0.627) 65(7.738,1.127) 66(7.738,1.627) 67(7.738,2.127) 68(7.738,2.627) 69(7.738,3.127) 70(7.738,3.627) 71(7.738,4.127) 72(7.738,4.627) 73(7.738,5.127) 74(7.738,5.627) 75(7.738,6.127)
  rect 0.254x1.475 smd: 26(-6,-7.611) 27(-5.5,-7.611) 28(-5,-7.611) 29(-4.5,-7.611) 30(-4,-7.611) 31(-3.5,-7.611) 32(-3,-7.611) 33(-2.5,-7.611) 34(-2,-7.611) 35(-1.5,-7.611) 36(-1,-7.611) 37(-0.5,-7.611) 38(0,-7.611) 39(0.5,-7.611) 40(1,-7.611) 41(1.5,-7.611) 42(2,-7.611) 43(2.5,-7.611) 44(3,-7.611) 45(3.5,-7.611) 46(4,-7.611) 47(4.5,-7.611) 48(5,-7.611) 49(5.5,-7.611) 50(6,-7.611) 76(6,7.865) 77(5.5,7.865) 78(5,7.865) 79(4.5,7.865) 80(4,7.865) 81(3.5,7.865) 82(3,7.865) 83(2.5,7.865) 84(2,7.865) 85(1.5,7.865) 86(1,7.865) 87(0.5,7.865) 88(0,7.865) 89(-0.5,7.865) 90(-1,7.865) 91(-1.5,7.865) 92(-2,7.865) 93(-2.5,7.865) 94(-3,7.865) 95(-3.5,7.865) 96(-4,7.865) 97(-4.5,7.865) 98(-5,7.865) 99(-5.5,7.865) 100(-6,7.865)
  silkscreen extent -6.65,-6.52 6.65,6.78, body extent -8,-8 8,8.13, height 1.6
RES_0603#1 [mil] "CASE: 0603"
  rect 35x35 smd: 1(-27.5,0) 2(27.5,0)
  silkscreen extent -53,-26 54,26, body extent -31,-16 31,16, height 18
RES_0603#2 [mil] "CASE: 0603"
  rect 35x35 smd mask+3: 1(-27.5,0) 2(27.5,0)
  silkscreen extent -53,-26 54,26, body extent -32,-16 31,16, height 18
RES_0805#1 [mm] "Resister"
  rect 1.3x1.5 smd: 1(0.95,0) 2(-0.95,0)
  silkscreen extent -1.83,-0.97 1.83,0.97, body extent -1,-0.63 1,0.62, height 0.5
RES_0805#2 [mm] "Resister"
  rect 1.3x1.5 smd mask+0.076: 1(0.95,0) 2(-0.95,0)
  silkscreen extent -1.83,-0.97 1.83,0.97, body extent -1,-0.63 1,0.62, height 0.5
RES_1206 [mm] "CASE: 1206"
  rect 1.35x1.75 smd: 1(1.5,0) 2(-1.5,0)
  silkscreen extent -2.44,-1.15 2.46,1.11, body extent -1.55,-0.77 1.55,0.78, height 0.55
RES_2512 [mil] "CASE: 2512"
  rect 80x125 smd: 1(-125,0) 2(125,0)
  silkscreen extent -178,-74 177,74, body extent -139,-60 136,61, height 19
SOIC16_50_284_25X90_SMT [mm]
  oval 2.5x0.635 smd mask+0.076: 1(-3.25,4.42)
  rect 2.5x0.635 smd mask+0.076: 2(-3.25,3.15) 3(-3.25,1.88) 4(-3.25,0.61) 5(-3.25,-0.66) 6(-3.25,-1.93) 7(-3.25,-3.2) 8(-3.25,-4.47) 9(3.25,-4.47) 10(3.25,-3.2) 11(3.25,-1.93) 12(3.25,-0.66) 13(3.25,0.61) 14(3.25,1.88) 15(3.25,3.15) 16(3.25,4.42)
  silkscreen extent -3.07,-5.3 2.26,5.44, body extent -3.02,-4.97 2.98,4.93, height 1.4
SOT223_3 [mm] "CASE: SOT223"
  rect 2.4x1 smd: 1(-2.875,2.275) 2(-2.875,-0.025) 3(-2.875,-2.325)
  rect 2.4x3.3 smd: 4(2.925,-0.025)
  silkscreen extent -3,-3.38 1.43,3.45, body extent -3.73,-3.28 3.27,3.22, height 1.7
SW_342_SMD [mm] "CASE: SMD"
  rect 2x2 smd: 1(0,0)
  rect 2.15x2.15 smd: 2(-8.5,0)
  silkscreen extent -10.25,-2.06 1.75,2, body extent -7.17,-1.79 -1.17,1.71, height 2.4
TSSOP16_25-59_294_54X14_SMT [mm] "TSOP, 16-Leads, Body 5.00x4.40mm, Pitch 0.65mm"
  oval 1.5x0.45 smd: 1(-2.908,2.273)
  rect 1.5x0.45 smd: 2(-2.908,1.623) 3(-2.908,0.973) 4(-2.908,0.323) 5(-2.908,-0.327) 6(-2.908,-0.977) 7(-2.908,-1.627) 8(-2.908,-2.277) 9(2.942,-2.277) 10(2.942,-1.627) 11(2.942,-0.977) 12(2.942,-0.327) 13(2.942,0.323) 14(2.942,0.973) 15(2.942,1.623) 16(2.942,2.273)
  silkscreen extent -2.97,-2.81 2.51,3.35, body extent -3.2,-2.55 3.2,2.55, height 1.2
VFQFN24_19.6_196_12X32_SMD_1 [mm] "CASE: VQFN24"
  rect 1.5x0.3 smd: 1(-1.25,3.25) 2(-1.25,2.75) 3(-1.25,2.25) 4(-1.25,1.75) 5(-1.25,1.25) 6(-1.25,0.75) 13(3.75,0.75) 14(3.754,1.25) 15(3.754,1.75) 16(3.754,2.25) 17(3.754,2.75) 18(3.754,3.25)
  rect 0.3x1.5 smd: 7(0,-0.5) 8(0.5,-0.5) 9(1,-0.5) 10(1.5,-0.5) 11(2,-0.5) 12(2.5,-0.5) 19(2.5,4.5) 20(2,4.5) 21(1.5,4.5) 22(1,4.5) 23(0.5,4.5) 24(0,4.5)
  rect 2.3x2.3 smd: 25(1.25,2)
  silkscreen extent -1.27,-0.05 3.35,4.37, body extent -0.8,-0.05 3.3,4.05, height 1
VQFN32_19_218_23X9_SMD [mm]
  rrect25% 0.6x0.25 smd: 1(-2.4,1.75) 2(-2.4,1.25) 3(-2.4,0.75) 4(-2.4,0.25) 5(-2.4,-0.25) 6(-2.4,-0.75) 7(-2.4,-1.25) 8(-2.4,-1.75) 17(2.4,-1.75) 18(2.4,-1.25) 19(2.4,-0.75) 20(2.4,-0.25) 21(2.4,0.25) 22(2.4,0.75) 23(2.4,1.25) 24(2.4,1.75)
  rrect25% 0.25x0.6 smd: 9(-1.75,-2.4) 10(-1.25,-2.4) 11(-0.75,-2.4) 12(-0.25,-2.4) 13(0.25,-2.4) 14(0.75,-2.4) 15(1.25,-2.4) 16(1.75,-2.4) 25(1.75,2.4) 26(1.25,2.4) 27(0.75,2.4) 28(0.25,2.4) 29(-0.25,2.4) 30(-0.75,2.4) 31(-1.25,2.4) 32(-1.75,2.4)
  rect 3.45x3.45 smd paste-3: 33(0,0)
  silkscreen extent -3.39,-2.95 2.95,2.95, body extent -2.56,-2.56 2.56,2.56, height 1.01
XTAL_314_240X47_SMD [mm] "CASE: TH"
  rect 6.096x1.2 smd: 1(0,0) 2(8,0)
  silkscreen extent -3.29,-2.44 11.32,2.57, body extent -2.99,-2.27 10.9,2.41, height 3.05

## Part data
C1: library part CAP_4.7uF-50V-10%-0805, "4.7µF ±10% 50V Ceramic Capacitor X5R 0805 (2012 Metric)", Alternate Part Number-1=NA, Case/Package=0805, Manufacturer=Yageo, Manufacturer Part Number=GRM21BR61H475KE51L, Supplier Part Number-1=CL21A475KBQNNNE, Supplier-1=SIRICOM
C2 C3 C4 C9 C14 C17 C23 C26 C29 C30 C31 C32 C35 C37 C38 C42 C45 C48 C53 C55 C56 C59 C60 C61 C62 C63 C64 C65 C69 C70 C74 C75 C78 C86 C89 C92 C95: library part CAP_0.1uF-50V-10%-0805, "0.1µF ±10% 50V Ceramic Capacitor X7R 0805 (2012 Metric)", Alternate Part Number-1=NA, Case/Package=0805, Manufacturer=Samsung, Manufacturer Part Number=CL21B104KBCNNNC, Supplier Part Number-1=0805B104K500CT, Supplier-1=SIRICOM
C5 C6 C66 C73: library part CAP_30pF-50V-10%-0805, "±10% 50V Ceramic Capacitor C0G, NP0 0805 (2012 Metric)", Alternate Part Number=NA, Case/Package=0805, Manufacturer=KEMET, Manufacturer Part Number=C0805C300K5GAC7800, Supplier Part Number-1="399-17443-1-ND - Cut Tape (CT)", Supplier-1=Digikey
C7 C13 C18 C24 C27 C28 C39 C41 C43 C44 C46 C51 C54 C67 C68 C76 C79 C80 C85 C88 C91 C94: library part CAP_1uF-50V-5%-0805, "1µF ±5% 50V Ceramic Capacitor X7R 0805 (2012 Metric)", Alternate Part Number-1=0805F105M500NT, Case/Package=0805, Manufacturer=Samsung, Manufacturer Part Number=CC0805JKX7R9BB105, Supplier Part Number-1=CL21B105KBFNNNE, Supplier-1=SIRICOM
C8 C15 C16 C33 C34: library part CAP_10nF-50V-10%-0805, "10000pF ±10% 50V Ceramic Capacitor X7R 0805 (2012 Metric)", Alternate Part Number-1=GRM2195C1H103JA01D, Case/Package=0805, Manufacturer=Samsung, Manufacturer Part Number=C0805C103K5RECAUTO, Supplier Part Number-1=0805B103K500CT, Supplier-1=SIRICOM
C11: library part CAP_2nF-50V-10%-0805, "2000pF ±10% 50V Ceramic Capacitor X7R 0805 (2012 Metric)", Alternate Part Number-1=NA, Case/Package=0805, Manufacturer="Samsung Electro-Mechanics", Manufacturer Part Number=CL21B202KBANNNC, Supplier Part Number-1="1276-2471-1-ND - Cut Tape (CT)", Supplier-1=Digikey
C12 C19 C47 C52 C84 C87 C90 C93: library part CAP_10uF-50V-10%-1206, "10µF ±10% 50V Ceramic Capacitor X7R 1206 (3216 Metric)", Alternate Part Number-1=GRT31CR61H106ME01L, Case/Package=1206, Manufacturer=KEMET, Manufacturer Part Number=CL31B106KBHNNNE, Supplier Part Number-1=CC1206KKX5R9BB106, Supplier-1=SIRICOM
C20 C21: library part CAP_20pF-50V-10%-0805, "±10% 50V Ceramic Capacitor C0G, NP0 0805 (2012 Metric)", Alternate Part Number-1=NA, Case/Package=0805, Manufacturer="AVX Corporation", Manufacturer Part Number=08055A200KAT2A, Supplier Part Number-1="478-11887-1-ND - Cut Tape (CT)", Supplier-1=Digikey
C22: library part CAP_10nF-1KV-10%-RAD-TH, "10000pF ±10% 1000V (1kV) Ceramic Capacitor X7R Radial", Alternate Part Number-1=NA, Case/Package=TH, Manufacturer=Yageo, Manufacturer Part Number=RDER73A103K2K1H03B, Supplier Part Number-1=RDER73A103K2K1H03B, Supplier-1="SP ROAD"
C25: library part CAP-P_100uF-25V-20%-RAD, "100µF 25V Aluminum Electrolytic Capacitors Radial, Can - SMD 1000 Hrs @ 105°C", Alternate Part Number-1=NA, Case/Package=Radial-SMD, Manufacturer=Nichicon, Manufacturer Part Number=UWT1E101MCL1GS, Supplier Part Number-1=UWT1E101MCL1GS, Supplier-1="SP ROAD"
C36 C40: library part CAP_22nF-50V-10%-0805, "0.022µF ±10% 50V Ceramic Capacitor X7R 0805 (2012 Metric)", Alternate Part Number-1=NA, Case/Package=0805, Manufacturer="Samsung Electro-Mechanics", Manufacturer Part Number=CL21B223KBANNNC, Supplier Part Number-1="1276-1081-1-ND - Cut Tape (CT)", Supplier-1=Digikey
C49 C50: library part CAP_150pF-50V-10%-0805, "150pF ±10% 50V Ceramic Capacitor C0G, NP0 0805 (2012 Metric)", Alternate Part Number-1=NA, Case/Package=0805, Manufacturer="AVX Corporation", Manufacturer Part Number=08055A151KAT2A, Supplier Part Number-1="478-10501-1-ND - Cut Tape (CT)", Supplier-1=Digikey
C71 C72: library part CAP_2.2uF-25V-10%-0805, "2.2µF ±10% 25V Ceramic Capacitor X7R 0805 (2012 Metric)", Alternate Part Number-1=NA, Case/Package=0805, Manufacturer=KEMET, Manufacturer Part Number=CL21B225KAFNFNE, Supplier Part Number-1=CL21A225KAFNNNE, Supplier-1=SIRICOM
C81 C82 C83: library part CAP-P_100uF-50V-20%-RAD, "100µF 50V Aluminum Polymer Capacitor Radial, Can - SMD 28mOhm 4000 Hrs @ 125°C", Alternate Part Number-1=VEU101M1HTR-1010, Case/Package=Radial-SMD, Manufacturer=Nichicon, Manufacturer Part Number=GYA1H101MCQ1GS, Supplier Part Number-1=GYA1H101MCQ1GS, Supplier-1="SP ROAD"
D1 D2 D3 D4: library part DIO-T_3.3V-8.8V-SOD923, "8.8V Clamp 5A (8/20µs) Ipp Tvs Diode Surface Mount SOD-923", Alternate Part Number-1=NA, Case/Package=SOD923, Manufacturer="Micro Commercial Co", Supplier Part Number-1="ESD3V3D9-TPMSCT-ND - Cut Tape (CT)", Manufacturer Part Number=ESD3V3D9-TP, Supplier-1=Digikey
D5 D7: library part DIO-S_445mV-30V-2A-SMB, "Diode Schottky 30V 2A Surface Mount SMB", Alternate Part Number-1=NA, Case/Package=SMB, Manufacturer="ON Semiconductor", Manufacturer Part Number=MBRS130LT3G, Supplier Part Number-1=MBRS130LT3G, Supplier-1=ARROW
D6: library part DIO-Z_3.3V-500mW-SOD123, "Zener Diode 3.3V 500mW ±6% Surface Mount SOD-123", Alternate Part Number-1=NA, Case/Package=SOD-123, Manufacturer="Diodes Incorporated", Supplier Part Number-1=BZT52C3V3-FDICT-ND, Manufacturer Part Number=BZT52C3V3-7-F, Supplier-1=Digikey
D8: library part DIO-Z_1.8V-500mW-DO213AA, "Zener Diode 1.8V 500mW ±5% Surface Mount DO-213AA"
DS1 DS2: library part LED_RED-2V-20mA-0805, "Red 631nm LED Indication - Discrete 2V 0805 (2012 Metric)", Alternate Part Number-1=NA, Case/Package=0805, Manufacturer="Vishay Lite-On", Manufacturer Part Number=LTST-C171KRKT, Supplier Part Number-1=LTST-C171KRKT, Supplier-1="SP ROAD"
FB1 FB3 FB4 FB5: library part FB_1K-100MHZ-1.6A-0805, "1 kOhms @ 100MHz 1 Power Line Ferrite Bead 0805 (2012 Metric) 1.6A", Alternate Part Number-1=NA, Case/Package=0805, Manufacturer=Laird, Manufacturer Part Number=BLM21SP102SH1D, Supplier Part Number-1=ACMS201209A102, Supplier-1=SIRICOM
J1: library part CON-BS-SKT_6X1-100-ST-TH, "6 Pins, 1 Row 2.54mm Pitch, Straight bergstrip, Female", Alternate Part Number-1=NA, Case/Package=TH-CON, Manufacturer=Molex, Manufacturer Part Number=22-10-2061, Supplier Part Number-1=NA, Supplier-1="SP ROAD"
J2 J5: library part CON_USB2.0-MINIB-SMD, "USB - mini B USB 2.0 Receptacle Connector 5 Position Surface Mount, Right Angle", Alternate Part Number-1=NA, Case/Package=USB-MINI-B, Manufacturer=EDAC, Manufacturer Part Number=690-005-299-043, Supplier Part Number-1=C105424, Supplier-1=LCSC
J3: library part CON-SKT-RJ_8C8P-RA-TH, "8 Pins, 2 Row 2.54mm Pitch, right angle Connector, male", Alternate Part Number-1=NA, Case/Package=TH-CON, Manufacturer=Assmann, Manufacturer Part Number=A-2004-2-4-LPS-N-R, Supplier Part Number-1=A-2004-2-4-LPS-N-R, Supplier-1="SP ROAD"
J4 J10: library part CON-PLG_2X1-100-ST-TH, "2 Pins, 1 Row 2.54mm Pitch, Straight Connector, male", Alternate Part Number-1=NA, Case/Package=TH-CON, Crimp Part Number=ASXHSXH22K51, Manufacturer=JST, Mating Part Number=XHP-2, Manufacturer Part Number=B2B-XH-A(LF)(SN), Supplier Part Number-1=B2B-XH-A(LF)(SN), Supplier-1="SP ROAD"
J6: library part CON-PLG_4X1-50-RA-TH, "4 Pins, 1 Row 1.25mm Pitch, right angle Connector, male", Alternate Part Number-1=NA, Case/Package=TH-CON, Crimp Part Number=653153128130, Manufacturer=JST, Manufacturer Part Number=653004117322, Mating Part Number=653004113322, Supplier Part Number-1=653004117322, Supplier-1=WURTH
J7: library part CON-PLG-STEREO_4X1-100-RA-SMD, "2.50mm (0.094\", 3/32\", Sub Mini, Miniature) - Headphone Phone Jack Stereo (4 Conductor, TRRS) Connector Solder", Alternate Part Number-1=NA, Case/Package=SMD, Manufacturer="CUI Devices", Manufacturer Part Number=SJ-2504A-SMT-TR, Supplier Part Number-1="CP-SJ-2504A-SMT-CT-ND - Cut Tape (CT)", Supplier-1=Digikey
J8 J9: library part CON-PLG_4X1-100-ST-TH, "4 Pins, 1 Row 2.54mm Pitch, straight Connector, male", Alternate Part Number-1=NA, Case/Package=TH-CON, Crimp Part Number=ASXHSXH22K51, Manufacturer="Wurth Electronics", Mating Part Number=XHP-4, Manufacturer Part Number=B4B-XH-A(LF)(SN), Supplier Part Number-1=B4B-XH-A(LF)(SN), Supplier-1=LCSC
J11: library part CON-TB_3X1-100-ST-TH, "3 Pins, 1 Row 2.54mm Pitch, straight Connector, male", Alternate Part Number-1=NA, Case/Package=TH-CON, Manufacturer="Phoenix Contact", Manufacturer Part Number=1725669, Supplier Part Number-1=1725669, Supplier-1="SP ROAD"
J12: library part CON-BS-PLG_4X1-100-ST-TH, "4 Pins, 1 Row 2.54mm Pitch, Straight bergstrip, Male", Alternate Part Number-1=NA, Case/Package=TH-CON, Manufacturer=NA, Manufacturer Part Number=NA, Supplier Part Number-1=NA, Supplier-1="SP ROAD"
MH1 MH2 MH3 MH4: library part MH_3.5H_6D, Alternate Part Number-1=NA, Case/Package=TH, Manufacturer=NA, Manufacturer Part Number=NA, Supplier Part Number-1=NA, Supplier-1=NA
Q1 Q2: library part MOSFET-N_60V-14.8A-V-DFN5045-12, "Mosfet Array 4 N-Channel 14.8A (Ta) Surface Mount V-DFN5045-12", Alternate Part Number-1=DMHT3006LFJ-13, Case/Package=DFN5045-12, Manufacturer="ON Semiconductor", Supplier Part Number-1=C460986, Manufacturer Part Number=DMHT6016LFJ-13, Supplier-1=LCSC
R1 R3 R27 R34 R36: library part RES_100K-0.1W-1%-0603, "100 kOhms ±1% 0.1W, 1/10W Chip Resistor 0603 (1608 Metric) Automotive AEC-Q200 Thick Film", Alternate Part Number-1=NA, Case/Package=0603, Manufacturer="Stackpole Electronics", Manufacturer Part Number=RMCF0603FT100K, Supplier Part Number-1=RMCF0603FT100K, Supplier-1=Arrow